# Altium PCB megaCAM.PcbDoc
Units mm, origin at the board's own origin, x right, y up, seen from the top; angles counter-clockwise.
Board outline 50 x 50 mm, 2 copper layers (Top Layer, Bottom Layer); 49 components, 50 nets, 205 pads, 44 vias.
Unrouted connection lines stored in the file: 1.
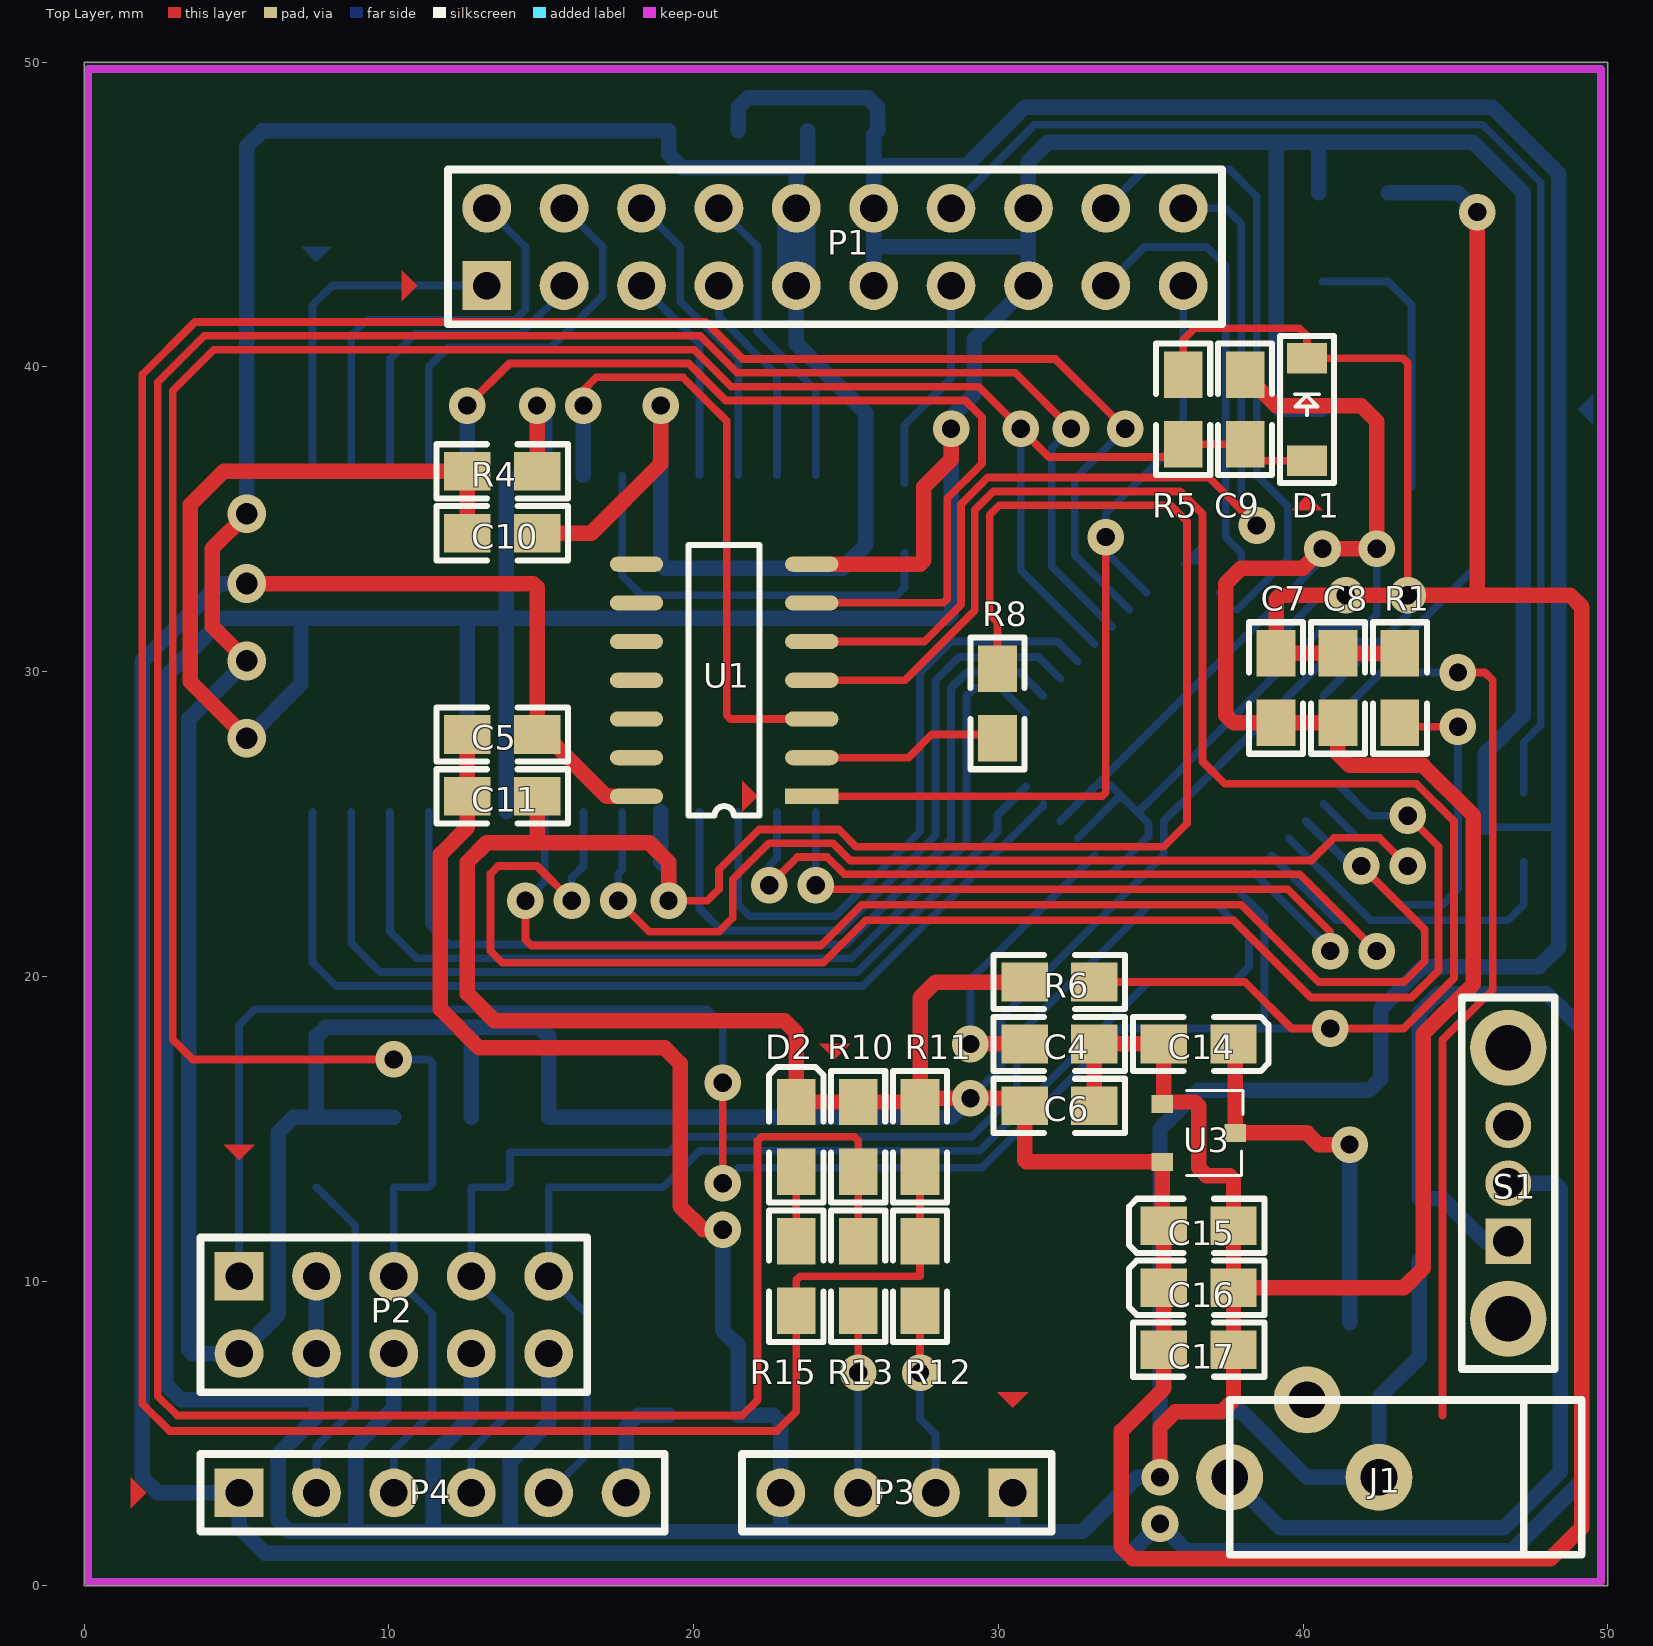
[diagram p0: Top Layer view]
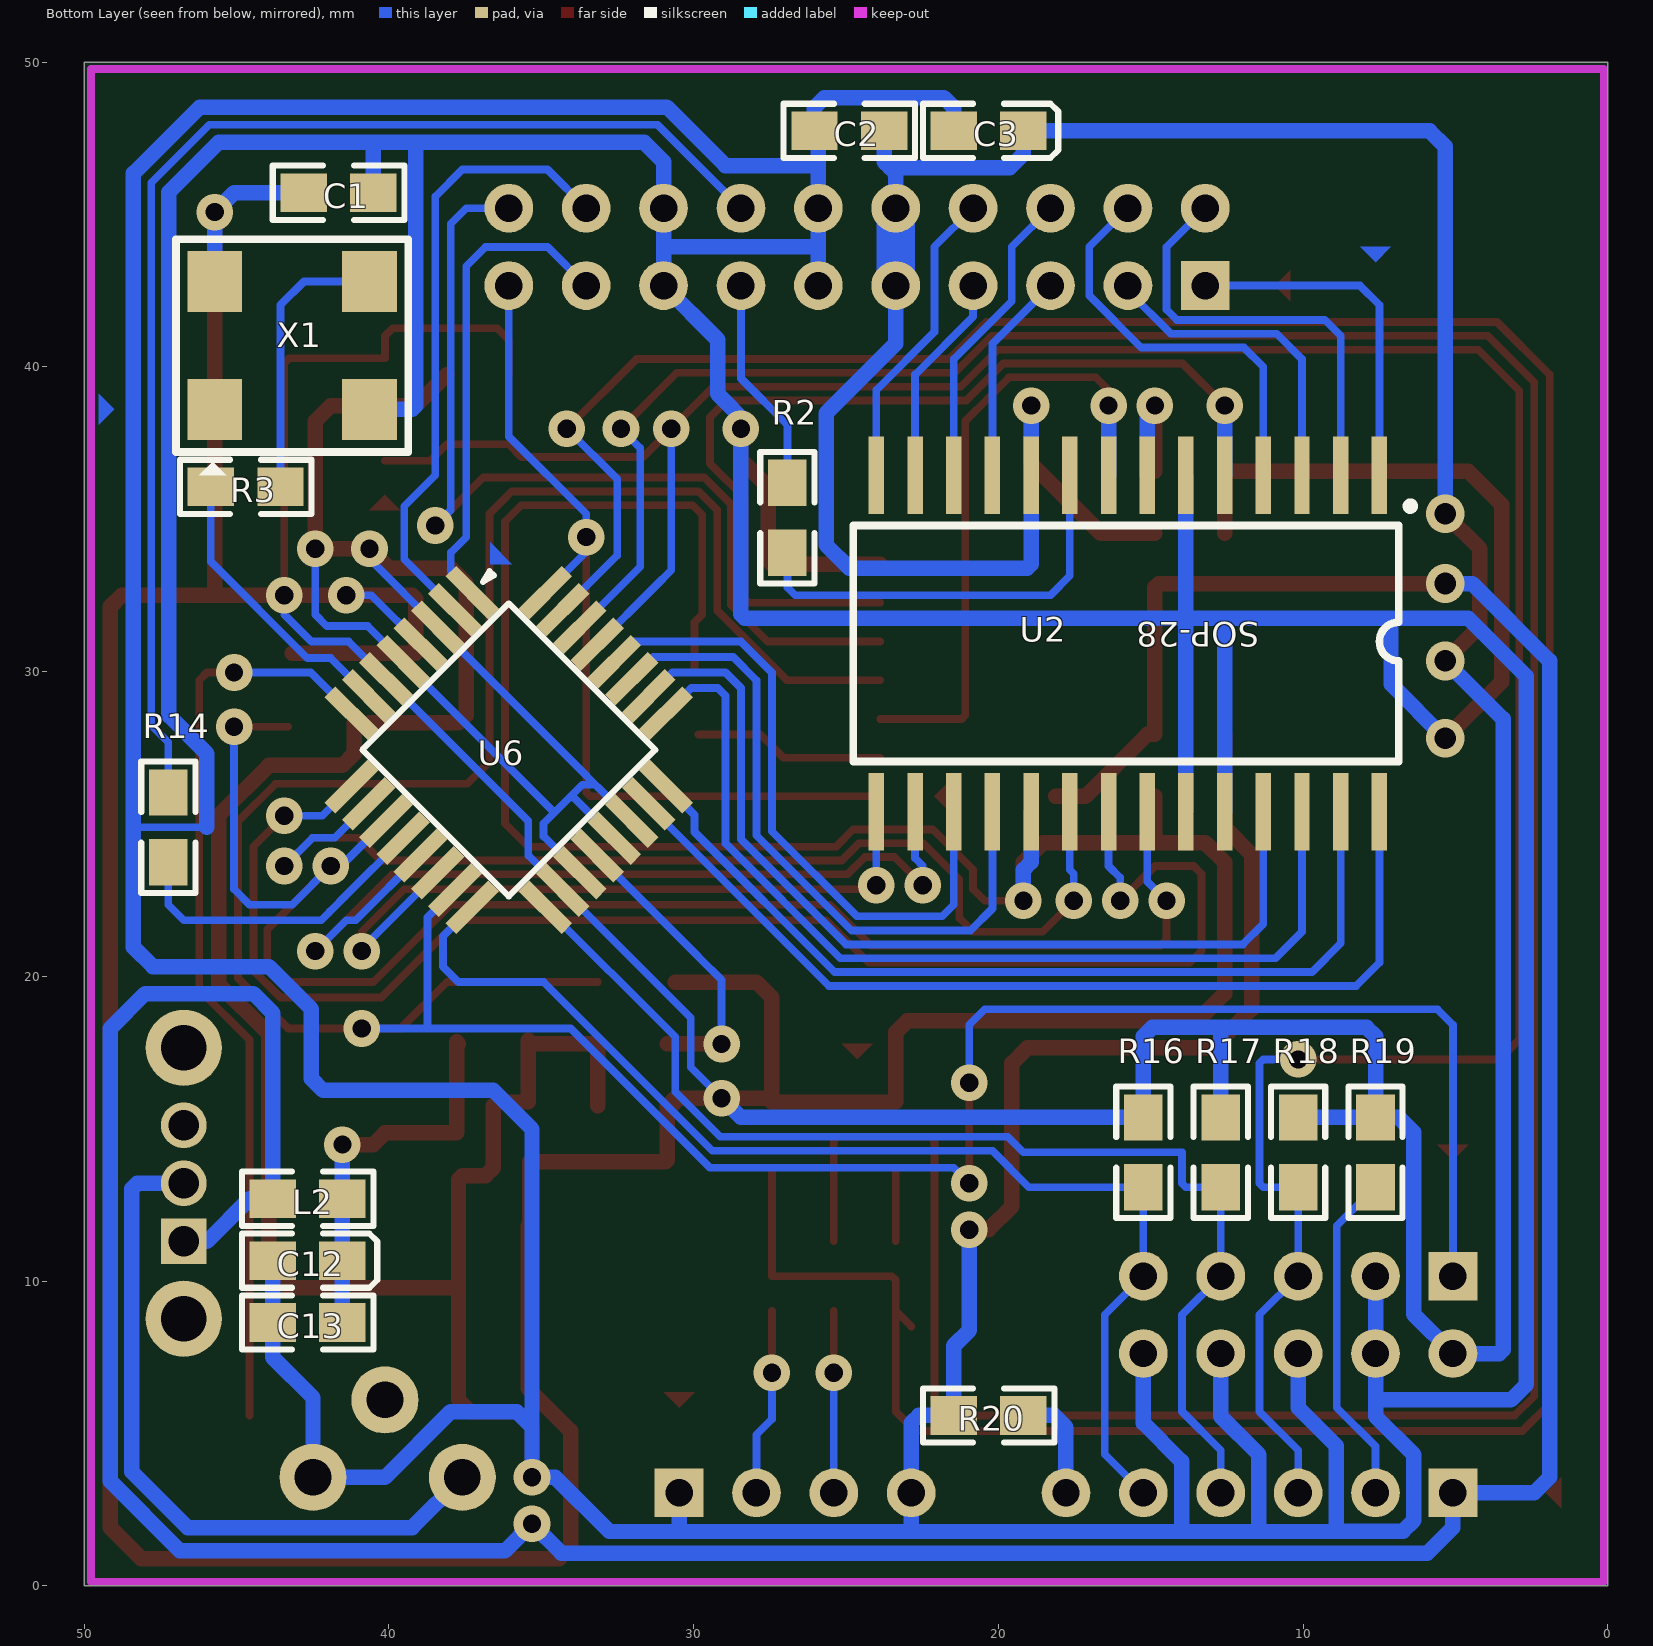
[diagram p1: Bottom Layer view, seen from below]

## Layer stack, top to bottom
Top Layer: signal copper 0.0356
Dielectric: dielectric 0.32, FR-4, Dk 4.8
Bottom Layer: signal copper 0.0356

## Board outline
0,0 50,0 50,50 0,50

## Design rules (kind name [scope] priority, off if disabled: settings)
Clearance [All] p1: gap=0.2
ComponentClearance [All] p1: gap=0 collisioncheckmode=3 verticalgap=0 showdistances=FALSE
HoleSize [All] p1: absolutevalues=TRUE maxlimit=5 minlimit=0.025 maxpercent=80.000 minpercent=20.000
HoleToHoleClearance [All] p1: gap=0.1 allowstackedmicrovias=TRUE
MinimumSolderMaskSliver [All] p1: minsoldermaskwidth=0
PolygonConnect [All] p1: connectstyle=Relief reliefconductorwidth=0.254 reliefentries=4 polygonreliefangle="90 Angle"
RoutingVias [All] p1: holewidth=0.5 width=1 viastyle="Through Hole" minholewidth=0.3 minwidth=0.6 maxholewidth=2.5 maxwidth=3
SMDNeckDown [All] p1: percent=100.000
SilkToSilkClearance [All] p1: silktosilkclearance=0
SilkscreenOverComponentPads [All] p1: minsilkscreentomaskgap=0
SolderMaskExpansion [All] p1: expansion=0.102
TestPointUsage [All] p1: valid=0 allowmultiple=FALSE
Testpoint [All] p1: side=15 testpointundercomponent=TRUE minsize=1.016 maxsize=2.54 preferedsize=1.524 minholesize=0 maxholesize=1.016 preferedholesize=0.813 testpointgrid=0.025 style=1021 order=0123456789
Width [All] p1: maxlimit=2.54 minlimit=0.127 preferedwidth=0.254
18 further rules are at their usual default settings.

## Components (designator, comment, footprint, x,y, rotation, side; value= is the part's Value field where it differs from the comment)
C1 "Cap" SMD_0805 41.656,45.72 r180 bottom
C2 "Cap" SMD_0805 24.892,47.752 r0 bottom
C3 "Cap" SMD_0805_POL 20.32,47.752 r0 bottom
C4 "Cap" SMD_0805 32.004,17.78 r0 top
C5 "Cap" SMD_0805 13.716,27.94 r180 top
C6 "Cap" SMD_0805 32.004,15.748 r0 top
C7 "Cap" SMD_0805 39.116,29.464 r270 top
C8 "Cap" SMD_0805 41.148,29.464 r270 top
C9 "Cap" SMD_0805 38.1,38.608 r270 top
C10 "Cap" SMD_0805 13.716,34.544 r0 top
C11 "Cap" SMD_0805 13.716,25.908 r180 top
C12 "Cap" SMD_0805_POL 42.672,10.668 r0 bottom
C13 "Cap" SMD_0805 42.672,8.636 r0 bottom
C14 "Cap" SMD_0805_POL 36.576,17.78 r180 top
C15 "Cap" SMD_0805_POL 36.576,11.811 r0 top
C16 "Cap" SMD_0805_POL 36.576,9.779 r0 top
C17 "Cap" SMD_0805 36.576,7.747 r0 top
D1 "Diode" SOD_123 40.132,38.608 r270 top
D2 "LED-YELLOW" SMD_0805_POL 23.368,14.732 r270 top
J1 "PWR2.5" POWER_S 37.592,3.556 r180 top
L2 "Inductor" SMD_0805 42.672,12.7 r180 bottom
P1 "Header 10 * 2" HDR_2×10 13.208,45.212 r0 top
P2 "Header 2*5" HDR_2×5 5.08,10.16 r0 top
P3 "Header 4" HDR_1×4 30.48,3.048 r180 top
P4 "Header 6" HDR_1×6 5.08,3.048 r0 top
R1 "Res" SMD_0805 43.18,29.464 r90 top
R2 "Res" SMD_0805 26.924,35.052 r270 bottom
R3 "Res" SMD_0805 44.704,36.068 r0 bottom
R4 "Res" SMD_0805 13.716,36.576 r0 top
R5 "Res" SMD_0805 36.068,38.608 r90 top
R6 "Res" SMD_0805 32.004,19.812 r180 top
R8 "Res" SMD_0805 29.972,28.956 r90 top
R10 "Res" SMD_0805 25.4,14.732 r90 top
R11 "Res" SMD_0805 27.432,14.732 r90 top
R12 "Res" SMD_0805 27.432,10.16 r270 top
R13 "Res" SMD_0805 25.4,10.16 r270 top
R14 "Res" SMD_0805 47.244,24.892 r270 bottom
R15 "Res" SMD_0805 23.368,10.16 r90 top
R16 "Res" SMD_0805 15.24,14.224 r90 bottom
R17 "Res" SMD_0805 12.7,14.224 r90 bottom
R18 "Res" SMD_0805 10.16,14.224 r90 bottom
R19 "Res" SMD_0805 7.62,14.224 r90 bottom
R20 "Res" SMD_0805 20.32,5.588 r0 bottom
S1 "SW-SPDT" SWITCH_SINGLE 46.736,10.668 r90 top
U1 "74LS00" SOIC_14 23.876,25.908 r180 top
U2 "AL422B" SOP_28 15.748,30.988 r0 bottom
U3 "3V3" SOT_23 36.576,14.859 r270 top
U6 "ATmega48V" TQFP_32 36.068,27.432 r225 bottom
X1 "Active Crystal" SMD_8541 45.72,38.608 r180 bottom

## Footprints (in the part's own frame and the unit in brackets; to place one, negate y for a bottom-side part, rotate by r counter-clockwise, add the part's x,y. Pads: shape width x height; smd on the part's side, far side on the other; paste and mask are expansions set on the pad)
HDR_1×4 [mm]
  rect 1.6x1.6 hole 0.9: 1(0,0)
  round 1.6 hole 0.9: 2(2.54,0) 3(5.08,0) 4(7.62,0)
  silkscreen extent -1.27,-1.27 8.89,1.27
HDR_1×6 [mm]
  rect 1.6x1.6 hole 0.9: 1(0,0)
  round 1.6 hole 0.9: 2(2.54,0) 3(5.08,0) 4(7.62,0) 5(10.16,0) 6(12.7,0)
  silkscreen extent -1.27,-1.27 13.97,1.27
HDR_2×5 [mm]
  rect 1.6x1.6 hole 0.9: 1(0,0)
  round 1.6 hole 0.9: 2(0,-2.54) 3(2.54,0) 4(2.54,-2.54) 5(5.08,0) 6(5.08,-2.54) 7(7.62,0) 8(7.62,-2.54) 9(10.16,0) 10(10.16,-2.54)
  silkscreen extent -1.27,-3.81 11.43,1.27
HDR_2×10 [mm]
  rect 1.6x1.6 hole 0.9: 1(0,-2.54)
  round 1.6 hole 0.9: 2(0,0) 3(2.54,-2.54) 4(2.54,0) 5(5.08,-2.54) 6(5.08,0) 7(7.62,-2.54) 8(7.62,0) 9(10.16,-2.54) 10(10.16,0) 11(12.7,-2.54) 12(12.7,0) 13(15.24,-2.54) 14(15.24,0) 15(17.78,-2.54) 16(17.78,0) 17(20.32,-2.54) 18(20.32,0) 19(22.86,-2.54) 20(22.86,0)
  silkscreen extent -1.27,-3.81 24.13,1.27
POWER_S [mm]
  round 2.2 hole 1.2: 1(0,0) 2(-4.902,0) 3(-2.54,-2.54)
  silkscreen extent -11.56,-2.54 0,2.54
SMD_0805 [mil] "WWW.OURAVR.COM"
  rect 60x50 smd: 1(-45,0) 2(45,0)
  silkscreen extent -85,-35 85,35
SMD_0805_POL [mil] "WWW.OURAVR.COM"
  rect 60x50 smd: 1(-45,0) 2(45,0)
  silkscreen extent -90,-35 85,35
SMD_8541 [mm]
  rect 1.8x2 smd: 1(0,0) 2(5.08,0) 3(5.08,4.2) 4(0,4.2)
  silkscreen extent -1.27,-2.16 6.35,5.59
SOD_123 [mm]
  rect 1x1.3 smd: 1(1.683,-0.002) 2(-1.677,-0.002)
  silkscreen extent -2.41,-0.89 2.41,0.89
SOIC_14 [mm]
  rect 1.75x0.5 smd: 1(0,0)
  oval 1.75x0.5 smd: 2(0,-1.27) 3(0,-2.54) 4(0,-3.81) 5(0,-5.08) 6(0,-6.35) 7(0,-7.62) 8(5.75,-7.62) 9(5.75,-6.35) 10(5.75,-5.08) 11(5.75,-3.81) 12(5.75,-2.54) 13(5.75,-1.27) 14(5.75,0)
  silkscreen extent 1.71,-8.25 4.04,0.64
SOP_28 [mil]
  rect 20x100 smd: 1(-325,-215) 2(-275,-215) 3(-225,-215) 4(-175,-215) 5(-125,-215) 6(-75,-215) 7(-25,-215) 8(25,-215) 9(75,-215) 10(125,-215) 11(175,-215) 12(225,-215) 13(275,-215) 14(325,-215) 15(325,220) 16(275,220) 17(225,220) 18(175,220) 19(125,220) 20(75,220) 21(25,220) 22(-25,220) 23(-75,220) 24(-125,220) 25(-175,220) 26(-225,220) 27(-275,220) 28(-325,220)
  silkscreen extent -370,-180 355,155
SOT_23 [mm]
  rect 0.6x0.7 smd: 1(0,1.2) 2(-0.95,-1.2) 3(0.95,-1.2)
  silkscreen extent -1.4,-0.4 1.4,1.45
SWITCH_SINGLE [mm]
  round 2.5 hole 1.5: 0(-1.905,0) 0(6.985,0)
  rect 1.5x1.5 hole 1: 1(0.635,0)
  round 1.5 hole 1: 2(2.54,0) 3(4.445,0)
  silkscreen extent -3.56,-1.52 8.64,1.52
TQFP_32 [mm] "www.ouravr.com"
  rect 2x0.5 smd: 1(-4.5,2.8) 2(-4.5,2) 3(-4.5,1.2) 4(-4.5,0.4) 5(-4.5,-0.4) 6(-4.5,-1.2) 7(-4.5,-2) 8(-4.5,-2.8) 17(4.5,-2.8) 18(4.5,-2) 19(4.5,-1.2) 20(4.5,-0.4) 21(4.5,0.4) 22(4.5,1.2) 23(4.5,2) 24(4.5,2.8)
  rect 0.5x2 smd: 9(-2.8,-4.5) 10(-2,-4.5) 11(-1.2,-4.5) 12(-0.4,-4.5) 13(0.4,-4.5) 14(1.2,-4.5) 15(2,-4.5) 16(2.8,-4.5) 25(2.8,4.5) 26(2,4.5) 27(1.2,4.5) 28(0.4,4.5) 29(-0.4,4.5) 30(-1.2,4.5) 31(-2,4.5) 32(-2.8,4.5)
  silkscreen extent -4.6,-3.4 3.4,3.7

## Part data
C1 C2 C4 C5 C6 C7 C8 C9 C10 C11 C13 C17: "Capacitor"
C3 C12 C14 C15 C16: library part "Cap Pol", "Polarized Capacitor (Surface Mount)"
D1: library part "Diode Schottky", "Schottky Diode"
D2: "Typical INFRARED GaAs LED"
J1: "Low Voltage Power Supply Connector"
P1: "Header, 10 * 2-Pin"
P2: "Header, 10-Pin"
P3: "Header, 4-Pin"
P4: "Header, 6-Pin"
R1 R2 R3 R4 R5 R6 R8 R10 R11 R12 R13 R14 R15 R16 R17 R18 R19 R20: "Resistor"
S1: "SPDT Subminiature Toggle Switch, Right Angle Mounting, Vertical Actuation"
U1: "Quad 2-Input NAND Gate"
U2: "Averlogic FIFO 3Mbits"
U3: library part XC6206, "LDOs"
U6: "具有8K系统内可编程Flash 的AVR8 位微控制器"
X1: library part XTAL_ACT, "active crystal"

## Via types
v1: diameter 1.2, hole 0.6, Top Layer to Bottom Layer, 40 vias
v2: diameter 1.27, hole 0.711, Top Layer to Bottom Layer, 4 vias

## Nets (pads, with @x,y where several pads share a name; then routed paths per layer and width w, separated by ;. In a path a pad name is that pad's centre, name@x,y a point inside that pad or via, vN(x,y) a via of type N, cw(c..) or ccw(c..) an arc to the next point about the centre after c; other vN are vias at no path point)
5V: C5.1 L2.1 P4.1 S1.1 U1.14 | length 131
  Top Layer w0.5: C5.1@15.113,27.94 17.145,25.908 U1.14
  Top Layer w0.508: v2(5.334,32.893) 14.732,32.893 14.859,32.766 C5.1 C5.1@15.113,27.94
  Bottom Layer w0.508: v2(5.334,32.893) 4.445,32.893 1.905,30.353 1.905,3.556 2.413,3.048 P4.1 5.08,1.905 5.915,1.07 34.344,1.07 v1(35.306,2.032) 36.195,1.143 46.863,1.143 49.149,3.429 49.149,18.288 48.006,19.431 44.45,19.431 43.815,18.796 L2.1 44.577,12.7 45.974,11.303 S1.1
#OE: R1.1 U2.22 U6.11 | length 53.4
  Top Layer w0.254: v1(14.478,22.479) 14.478,21.209 14.678,21.009 24.177,21.009 25.52,22.352 37.973,22.352 40.513,19.812 43.307,19.812 43.996,20.501 43.996,21.536 v1(41.91,23.622) ; R1.1@43.307,28.194 v1(45.085,28.194)
  Bottom Layer w0.254: v1(14.478,22.479) 15.113,23.114 U2.22 ; U6.11 41.575,23.622 v1(41.91,23.622) 43.18,22.352 44.577,22.352 45.085,22.86 v1(45.085,28.194)
#RRST: U2.21 U6.9 | length 50.2
  Top Layer w0.254: v1(16.002,22.479) 14.859,23.622 13.589,23.622 13.335,23.368 13.335,20.828 13.716,20.447 24.257,20.447 25.654,21.844 37.719,21.844 40.259,19.304 43.561,19.304 44.45,20.193 44.45,24.257 v1(43.434,25.273)
  Bottom Layer w0.254: v1(16.002,22.479) 16.002,23.241 16.383,23.622 U2.21 ; U6.9 42.187,25.273 v1(43.434,25.273)
#RST: C9.2 D1.1 P2.5 P4.3 R5.1 R18.1 U6.29 | length 94.2
  Top Layer w0.254: v1(10.16,17.272) 3.556,17.272 2.902,17.926 2.902,39.224 4.248,40.57 20.023,40.57 21.239,39.354 29.353,39.354 v1(30.734,37.973) 31.661,37.046 35.649,37.046 R5.1 C9.2 38.64,36.925 D1.1
  Bottom Layer w0.254: P4.3 10.16,4.445 11.43,5.715 11.43,8.89 P2.5 R18.1 11.303,13.081 11.43,13.208 11.43,17.145 11.303,17.272 v1(10.16,17.272) ; v1(30.734,37.973) 30.734,33.332 31.271,32.795 U6.29
CLKOUT: P1.14 R14.1 | length 42.1
  Bottom Layer w0.254: P1.14 31.188,47.952 45.901,47.952 47.806,46.047 47.806,33.274 ; R14.1 47.244,27.686 47.806,28.248 47.806,33.274 ; 47.806,32.658 47.806,33.274
DI0: P1.1 U2.1 | length 11.6
  Bottom Layer w0.254: U2.1 7.493,42.037 8.128,42.672 P1.1
DI1: P1.2 U2.2 | length 14.5
  Bottom Layer w0.254: U2.2 8.763,41.021 9.287,41.545 14.143,41.545 14.478,41.88 14.478,43.942 P1.2
DI2: P1.3 U2.3 | length 10.6
  Bottom Layer w0.254: U2.3 10.033,40.259 10.865,41.091 14.331,41.091 15.748,42.508 P1.3
DI3: P1.4 U2.4 | length 13.6
  Bottom Layer w0.254: U2.4 11.303,40.005 11.935,40.637 15.307,40.637 17.018,42.348 17.018,43.942 P1.4
DI4: P1.5 U2.11 | length 7
  Bottom Layer w0.254: P1.5 20.193,40.767 U2.11
DI5: P1.6 U2.12 | length 10.1
  Bottom Layer w0.254: P1.6 19.558,43.942 19.558,42.164 21.463,40.259 U2.12
DI6: P1.7 U2.13 | length 7
  Bottom Layer w0.254: P1.7 20.828,41.656 22.733,39.751 U2.13
DI7: P1.8 U2.14 | length 10.1
  Bottom Layer w0.254: P1.8 22.098,43.942 22.098,41.148 24.003,39.243 U2.14
DO0: U2.28 U6.23 | length 31.8
  Bottom Layer w0.254: U2.28 7.493,20.447 8.255,19.685 25.562,19.685 31.472,25.595 U6.23
DO1: U2.27 U6.24 | length 29.7
  Bottom Layer w0.254: U2.27 8.763,21.082 9.706,20.139 25.374,20.139 29.972,24.737 29.972,25.296 U6.24
DO2: U2.26 U6.25 | length 32
  Bottom Layer w0.254: U2.26 10.033,21.463 10.903,20.593 25.186,20.593 28.956,24.363 28.956,29.21 29.21,29.464 30.076,29.464 U6.25
DO3: U2.25 U6.26 | length 31.1
  Bottom Layer w0.254: U2.25 11.303,21.717 11.973,21.047 24.998,21.047 28.448,24.497 28.448,29.464 28.956,29.972 30.7,29.972 U6.26
DO4: U2.18 U6.27 | length 22.3
  Bottom Layer w0.254: U2.18 20.193,22.225 20.917,21.501 24.81,21.501 27.94,24.631 27.94,29.718 28.702,30.48 31.323,30.48 U6.27
DO5: U2.17 U6.28 | length 21.4
  Bottom Layer w0.254: U2.17 21.463,22.352 21.844,21.971 24.638,21.971 27.432,24.765 27.432,29.972 28.448,30.988 31.946,30.988 U6.28
DO6: U2.16 U6.13 | length 28.9
  Top Layer w0.254: v1(22.479,22.987) 23.406,23.914 24.387,23.914 24.952,23.349 39.897,23.349 v1(42.418,20.828)
  Bottom Layer w0.254: v1(22.479,22.987) 22.479,23.622 22.733,23.876 U2.16 ; U6.13 41.09,21.844 41.402,21.844 v1(42.418,20.828)
DO7: U2.15 U6.14 | length 24.3
  Top Layer w0.254: v1@24.13,22.987 v1(24.003,22.987) 24.13,22.86 39.497,22.86 40.894,21.463 v1(40.894,20.828)
  Bottom Layer w0.254: v1(24.003,22.987) U2.15 ; U6.14 40.894,20.909 v1(40.894,20.828)
GND: C1.2 C2.2 C3.2 C4.2 C5.2 C6.2 C7.2 C8.2 C9.1 C10.1 C11.2 C12.2 C13.2 C14.2 C15.2 C16.2 C17.2 J1.2 P1.11 P1.12 P1.15 P1.16 P2.3 P2.4 P2.6 P2.8 P2.10 P3.1 P3.4 R4.1 R20.2 U1.7 U2.6 U2.23 U2.24 U3.2 U6.3 U6.5 U6.19 U6.21 U6.22 X1.2 | length 483.6
  Top Layer w0.5: U1.7 26.797,33.528
  Top Layer w0.508: v2(5.334,27.813) 3.483,29.664 3.483,35.487 4.572,36.576 R4.1 C10.1 ; C5.2 C11.2 12.573,24.892 11.684,24.003 11.684,18.923 12.954,17.653 19.05,17.653 19.558,17.145 19.558,12.446 20.32,11.684 v1(20.955,11.684) ; 26.797,33.528 27.432,33.528 27.559,33.655 27.559,36.068 28.448,36.957 v1(28.448,37.973) ; C6.2 C4.2 C14.2 ; v1(35.306,3.556) 35.306,5.207 35.814,5.715 37.338,5.715 37.719,6.096 C17.2 C16.2 ; C14.2@35.433,17.907 C14.2 ; C9.1 39.116,38.735 41.91,38.735 42.418,38.227 v1(42.418,34.036) v1(40.64,34.036) 40.005,33.401 37.973,33.401 37.465,32.893 37.465,28.575 37.719,28.321 40.132,28.321 C8.2@40.64,28.321 ; C8.2 41.148,27.305 41.529,26.924 43.942,26.924 45.593,25.273 45.593,19.752 43.942,18.101 43.942,10.414 43.307,9.779 C16.2 ; C14.2 35.433,15.875 36.449,15.875 36.576,15.748 36.576,13.716 36.83,13.462 37.592,13.462 37.719,13.335 C15.2 C16.2
  Bottom Layer w0.254: U6.22 33.124,26.185 33.228,26.289 ; U6.21 33.909,25.839 ; U6.19 34.925,24.592 34.925,25.019 34.544,25.4 ; v1(40.64,34.036) 40.64,33.701 U6.3 37.124,30.186 33.759,26.82 33.228,26.289 ; v1(42.418,34.036) 42.418,31.877 42.037,31.496 40.698,31.496 U6.5 38.637,29.435 34.602,25.4 34.544,25.4 ; 45.974,24.892 48.387,24.892 ; 33.228,26.289 33.655,26.289 34.544,25.4
  Bottom Layer w0.508: v2(5.334,27.813) 7.112,29.591 7.112,31.75 ; P2.3 P2.4 7.62,6.096 ; 8.874,1.794 6.715,1.794 6.366,2.143 6.366,4.302 7.62,5.556 7.62,6.096 ; 8.89,1.778 22.86,1.778 ; 8.906,1.794 8.906,4.588 10.16,5.842 P2.6 ; 11.446,1.794 11.446,4.302 12.7,5.556 P2.8 ; U2.24 12.573,31.623 12.7,31.75 ; U2.23 13.843,31.75 ; U2.6 13.843,31.75 ; 13.986,1.794 13.986,4.08 15.24,5.334 P2.10 ; v1(20.955,11.684) 20.955,8.382 21.463,7.874 R20.2 22.606,5.588 22.86,5.334 P3.4 22.86,1.778 ; C3.2 21.463,48.514 21.79,48.841 25.708,48.841 26.035,48.514 C2.2 ; P1.11 25.908,43.942 ; C2.2@25.908,47.625 25.908,46.609 ; v1@28.194,37.973 28.194,38.1 29.21,39.116 29.21,40.894 P1.15 30.988,43.942 ; v1(28.448,37.973) 28.448,31.877 28.321,31.75 13.843,31.75 ; P3.1 30.48,1.778 ; C1.2 40.513,47.244 40.386,47.371 ; X1.2 39.243,38.608 39.116,38.735 39.116,47.371 ; C12.2 C13.2 43.815,7.493 42.494,6.172 J1.2 40.132,3.556 37.973,5.715 35.814,5.715 35.306,5.207 ; 45.974,24.892 45.974,27.305 47.225,28.556 47.225,45.739 45.593,47.371 40.386,47.371 ; 7.112,31.75 12.7,31.75 ; 7.112,31.75 4.572,31.75 2.667,29.845 2.667,6.604 3.175,6.096 7.62,6.096 ; 12.7,31.75 13.843,31.75 ; 22.86,1.778 30.48,1.778 ; 25.908,43.942 P1.12 25.908,46.609 ; 25.908,43.942 30.988,43.942 ; 25.908,46.609 28.956,46.609 30.88,48.533 46.209,48.533 48.387,46.355 48.387,24.892 48.387,20.955 47.752,20.32 43.942,20.32 42.545,18.923 42.545,16.637 42.164,16.256 36.576,16.256 35.306,14.986 35.306,5.207 ; 30.48,1.778 32.766,1.778 34.544,3.556 v1(35.306,3.556) 35.306,5.207 ; 30.988,43.942 P1.16 30.988,46.736 31.623,47.371 39.116,47.371 ; 39.116,47.371 40.386,47.371
HREF: P1.20 U1.5 | length 31.8
  Top Layer w0.254: U1.5 27.566,30.988 28.775,32.197 28.775,35.499 29.404,36.128 ; 29.471,36.195 29.404,36.128 ; v1(38.481,34.798) 36.903,36.376 29.652,36.376 29.404,36.128
  Bottom Layer w0.254: P1.20 37.465,45.212 37.973,44.704 37.973,35.306 v1(38.481,34.798)
MISO: P2.9 P4.5 R16.1 U6.16 | length 39.4
  Bottom Layer w0.254: P4.5 16.51,4.318 16.51,8.89 P2.9 R16.1 18.996,13.081 20.193,14.278 29.384,14.278 34.918,19.812 37.719,19.812 38.227,20.32 38.227,21.313 U6.16
MOSI: P2.1 R6.1 U1.4 U6.15 | length 111.1
  Top Layer w0.254: v1(20.955,13.208) v1(20.955,16.51) ; U1.4 26.938,29.718 29.229,32.009 29.229,35.306 29.84,35.917 35.965,35.917 36.322,35.56 ; R6.1 38.1,19.812 39.624,18.288 v1(40.894,18.288) 43.307,18.288 44.958,19.939 44.958,25.086 43.722,26.323 37.431,26.323 36.703,27.051 36.703,35.179 36.322,35.56 ; 36.141,35.741 36.322,35.56
  Bottom Layer w0.254: P2.1 5.08,18.415 5.588,18.923 20.447,18.923 20.955,18.415 v1(20.955,16.51) ; v1(20.955,13.208) 21.463,13.716 23.622,13.716 ; 22.606,13.716 23.622,13.716 ; U6.15 38.735,21.937 38.735,18.288 ; v1(40.894,18.288) 38.735,18.288 ; 23.622,13.716 29.464,13.716 34.036,18.288 38.735,18.288
NetC4_1: C4.1 U6.20 | length 9.8
  Top Layer w0.508: v1@28.956,17.78 v1(29.083,17.78) C4.1
  Bottom Layer w0.254: v1(29.083,17.78) 29.083,19.881 29.799,20.597 29.874,20.672 U6.20
NetC12_1: C12.1 C13.1 C14.1 L2.2 U3.1 | length 12.8
  Top Layer w0.508: C14.1 37.776,17.85 37.776,17.78 U3.1 40.132,14.859 40.513,14.478 v1(41.529,14.478)
  Bottom Layer w0.508: C13.1 C12.1 L2.2 v1(41.529,14.478)
NetD2_2: D2.2 R15.2 | length 2.3
  Top Layer w0.254: R15.2 D2.2
NetJ1_1: J1.1 S1.2 | length 23.4
  Bottom Layer w0.508: J1.1 39.243,1.905 46.609,1.905 48.44,3.736 48.44,10.414 48.44,13.028 48.26,13.208 46.973,13.208 S1.2
NetP3_2: P3.2 R12.2 | length 6.2
  Top Layer w0.254: v1(27.432,6.985) R12.2
  Bottom Layer w0.254: v1(27.432,6.985) 27.432,5.461 27.94,4.953 P3.2
NetP3_3: P3.3 R13.2 | length 6
  Top Layer w0.254: v1(25.4,6.985) R13.2
  Bottom Layer w0.254: P3.3 v1(25.4,6.985)
NetP4_6: P4.6 R20.1 | length 3.7
  Bottom Layer w0.508: P4.6 17.78,5.207 18.161,5.588 R20.1
NetR2_2: R2.2 U2.9 | length 14.1
  Bottom Layer w0.254: U2.9 17.653,33.147 18.288,32.512 26.67,32.512 26.924,32.766 R2.2
NetR3_1: R3.1 X1.3 | length 9.2
  Bottom Layer w0.254: X1.3 42.79,42.808 43.561,42.037 R3.1
NetR3_2: R3.2 U6.7 | length 9.5
  Bottom Layer w0.254: U6.7 41.91,30.446 42.679,30.446 45.847,33.614 R3.2
NetR4_2: R4.2 U2.7 | length 4.6
  Top Layer w0.508: R4.2 v1(14.859,38.735)
  Bottom Layer w0.508: v1(14.859,38.735) 15.113,38.481 U2.7
NetR8_1: R8.1 U1.2 | length 6.5
  Top Layer w0.254: U1.2 27.051,27.178 27.813,27.94 28.575,27.94 ; 28.829,27.94 28.575,27.94 ; R8.1@29.845,27.94 28.575,27.94
NetR14_2: R14.2 U6.12 | length 10.7
  Bottom Layer w0.254: U6.12 41.46,22.606 41.812,22.254 ; 41.968,22.098 41.812,22.254 ; R14.2 47.244,22.352 46.736,21.844 46.228,21.844 42.222,21.844 41.812,22.254
NetU1_3: U1.3 U2.8 | length 20.9
  Top Layer w0.254: v1(16.383,38.735) 16.383,39.243 16.802,39.662 19.647,39.662 20.32,38.989 ; 20.447,38.862 20.32,38.989 ; U1.3 21.209,28.448 21.082,28.575 21.082,38.227 20.32,38.989
  Bottom Layer w0.508: U2.8 v1(16.383,38.735)
NetU1_6: U1.6 U2.5 | length 31.4
  Top Layer w0.254: v1(12.573,38.735) 13.954,40.116 19.835,40.116 21.051,38.9 28.918,38.9 29.464,38.354 29.464,38.1 29.464,36.83 28.321,35.687 28.321,32.385 28.194,32.258 U1.6
  Bottom Layer w0.508: U2.5 v1(12.573,38.735)
PB7: P4.2 R19.1 U6.8 | length 41.6
  Top Layer w0.254: 44.577,5.588 44.577,17.915 46.228,19.566 46.228,29.718 45.974,29.972 v1(45.085,29.972)
  Bottom Layer w0.254: P4.2 7.62,4.572 8.89,5.842 8.89,11.811 R19.1 ; U6.8 42.568,29.972 v1(45.085,29.972)
PCLK: P1.13 R2.1 | length 7.1
  Bottom Layer w0.254: R2.1 26.924,38.1 28.448,39.624 P1.13
PD2_INT0: P1.19 U1.1 U6.32 | length 29.8
  Top Layer w0.254: U1.1 33.401,25.908 33.528,26.035 v1(33.528,34.417)
  Bottom Layer w0.254: U6.32 33.528,33.932 v1(33.528,34.417) 33.528,35.179 36.068,37.719 P1.19
PD3: P1.17 U6.1 | length 15.9
  Bottom Layer w0.254: P1.17 34.798,43.942 36.83,43.942 37.465,43.307 37.465,34.417 37.973,33.909 37.973,33.297 U6.1
PD4: P1.18 U6.2 | length 20.5
  Bottom Layer w0.254: P1.18 34.798,46.482 37.592,46.482 38.481,45.593 38.481,36.449 39.497,35.433 39.497,33.689 U6.2
PD6: U2.20 U6.10 | length 35.8
  Top Layer w0.254: v1(17.526,22.479) 18.542,21.463 20.828,21.463 21.282,21.917 21.282,23.187 22.463,24.368 24.575,24.368 25.14,23.803 40.275,23.803 41.021,24.549 42.507,24.549 v1(43.434,23.622)
  Bottom Layer w0.254: v1(17.526,22.479) 17.526,23.368 17.653,23.495 U2.20 ; U6.10 41.779,24.549 42.507,24.549 v1(43.434,23.622)
RXD: R10.1 R13.1 U6.30 | length 108.1
  Top Layer w0.254: R13.1 R10.1 25.4,14.605 25.273,14.732 22.225,14.732 22.098,14.605 22.098,6.096 21.59,5.588 3.048,5.588 2.413,6.223 2.413,39.497 3.94,41.024 20.211,41.024 21.427,39.808 30.55,39.808 v1(32.385,37.973)
  Bottom Layer w0.254: v1(32.385,37.973) 31.75,37.338 31.75,33.447 U6.30
SPCK: P2.7 P4.4 R17.1 U6.17 | length 38.7
  Bottom Layer w0.254: P4.4 12.7,4.445 13.97,5.715 13.97,8.89 P2.7 R17.1 13.843,13.081 13.97,13.208 13.97,14.224 19.18,14.224 19.688,14.732 29.124,14.732 30.607,16.215 30.607,18.011 U6.17
TXD: R11.1 R12.1 R15.1 U6.31 | length 110.3
  Top Layer w0.254: R15.1@22.86,8.509 R15.1 ; R11.1 R12.1 27.432,10.16 23.495,10.16 23.368,10.033 R15.1 ; v1(34.163,37.973) 31.874,40.262 21.615,40.262 20.399,41.478 3.632,41.478 1.905,39.751 1.905,5.969 2.794,5.08 22.733,5.08 23.368,5.715 R15.1
  Bottom Layer w0.254: v1(34.163,37.973) 32.512,36.322 32.512,33.816 U6.31
VCC: C1.1 C2.1 C3.1 C6.1 C7.1 C8.1 C10.2 C11.1 C15.1 C16.1 C17.1 D1.2 D2.1 P1.9 P1.10 P2.2 R1.2 R5.2 R6.2 R8.2 R10.2 R11.2 R16.2 R17.2 R18.2 R19.2 U2.10 U2.19 U3.3 U6.4 U6.6 U6.18 X1.4 | length 367.9
  Top Layer w0.254: v1(19.177,22.479) 20.447,22.479 20.828,22.86 20.828,23.495 22.155,24.822 24.763,24.822 25.328,24.257 27.813,24.257 ; 28.321,24.257 27.813,24.257 ; R8.2 29.972,31.623 29.718,31.877 29.718,35.153 30.028,35.463 35.657,35.463 36.195,34.925 36.195,25.019 35.433,24.257 27.813,24.257 ; R5.2 36.068,40.894 36.449,41.275 39.878,41.275 40.13,41.023 D1.2 43.281,40.285 43.434,40.132 v1(43.434,32.512)
  Top Layer w0.508: v2(5.334,30.353) 4.191,31.496 4.191,34.036 v2(5.334,35.179) ; C11.1 14.859,24.511 14.986,24.384 ; C10.2 16.637,34.544 18.923,36.83 v1(18.923,38.735) ; v1(19.177,22.479) 19.177,23.749 18.542,24.384 14.986,24.384 ; C6.1@30.607,16.002 C6.1 ; R6.2@30.607,19.812 27.94,19.812 27.432,19.304 R11.2 ; R1.2 C8.1 C7.1 39.116,32.385 39.243,32.512 v1(41.402,32.512) v1(43.434,32.512) 45.72,32.512 ; v1(45.72,45.085) 45.72,32.512 ; 14.986,24.384 13.208,24.384 12.573,23.749 12.573,19.431 13.462,18.542 22.987,18.542 23.368,18.161 D2.1 R10.2 R11.2 ; R11.2 27.559,16.002 v1(29.083,16.002) 30.48,16.002 30.734,15.748 C6.1 ; C6.1 30.861,13.97 30.922,13.909 U3.3 35.376,11.868 C15.1 C16.1 C17.1 35.433,6.477 34.036,5.08 34.036,1.27 34.417,0.889 48.133,0.889 49.149,1.905 49.149,32.131 48.768,32.512 45.72,32.512
  Bottom Layer w0.254: v1(29.083,16.002) 30.099,17.018 30.099,18.635 U6.18 35.433,23.969 35.433,25.1 U6.6 41.321,30.988 42.545,30.988 43.434,31.877 v1(43.434,32.512) ; U6.4 40.582,32.512 v1(41.402,32.512)
  Bottom Layer w0.508: v2(5.334,30.353) 3.429,28.448 3.429,7.747 3.556,7.62 P2.2 6.366,8.906 6.366,14.875 6.858,15.367 R19.2 ; v2(5.334,35.179) 5.334,47.244 5.842,47.752 C3.1 19.177,46.99 19.621,46.545 23.558,46.545 ; R18.2 R19.2 ; R17.2 12.7,18.326 ; U2.19 18.923,23.749 19.177,23.495 v1@19.177,22.987 ; v1(18.923,38.735) U2.10 18.923,33.528 19.05,33.401 24.892,33.401 25.654,34.163 25.654,38.481 23.368,40.767 P1.9 ; P1.10 23.368,46.355 23.558,46.545 ; C2.1 23.749,46.736 23.558,46.545 ; v1(29.083,16.002) 28.448,15.367 R16.2 15.24,18.034 14.948,18.326 12.7,18.326 ; C1.1 45.085,45.72 v1(45.72,45.085) X1.4 ; R19.2 7.62,18.034 7.912,18.326 12.7,18.326
  Bottom Layer w1.27: P1.9 P1.10
pads on no net: J1.3 S1.0 S1.3 U1.8 U1.9 U1.10 U1.11 U1.12 U1.13 X1.1

## Keep-outs
Keep-Out Layer:
  lines w0.254: 0.127,0.127 0.127,49.784 49.784,49.784 49.784,0.127 0.127,0.127

## Other copper
Top Layer:
  region: 21.59,25.4 21.59,26.416 22.098,25.908
  region: 24.13,17.78 25.146,17.78 24.638,17.272
  region: 40.64,35.306 39.624,35.306 40.132,35.814
  region: 10.414,42.164 10.414,43.18 10.922,42.672
  region: 4.572,14.478 5.588,14.478 5.08,13.97
  region: 1.524,2.54 1.524,3.556 2.032,3.048
  region: 29.972,6.35 30.988,6.35 30.48,5.842
Bottom Layer:
  region: 49.53,39.116 49.53,38.1 49.022,38.608
  region: 7.112,43.942 8.128,43.942 7.62,43.434
  region: 35.963,33.528 36.681,34.246 36.681,33.528

## Dimensions
0.2,0.2 to 0.2,49.8 on Mechanical 1
0.2,0.2 to 49.8,0.2 on Mechanical 1

## Text inside footprints (layer, text, board x,y; h text height)
U2: Bottom Overlay "SOP-28" at 11.43,31.623 h0.8 r180